# Allegro board LED5.brd
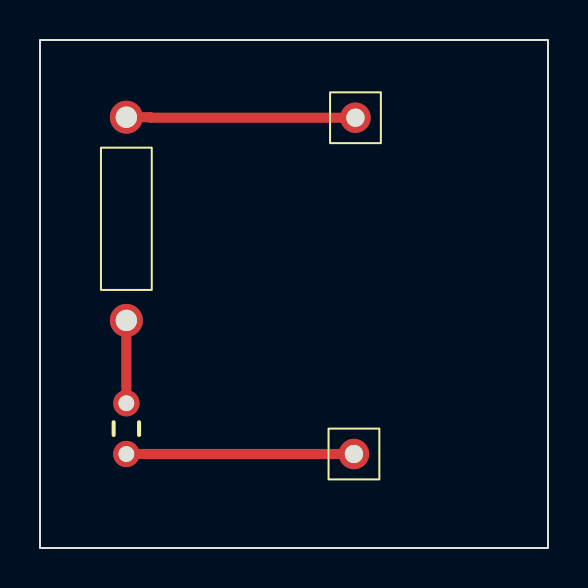
[diagram p0: board, top side]
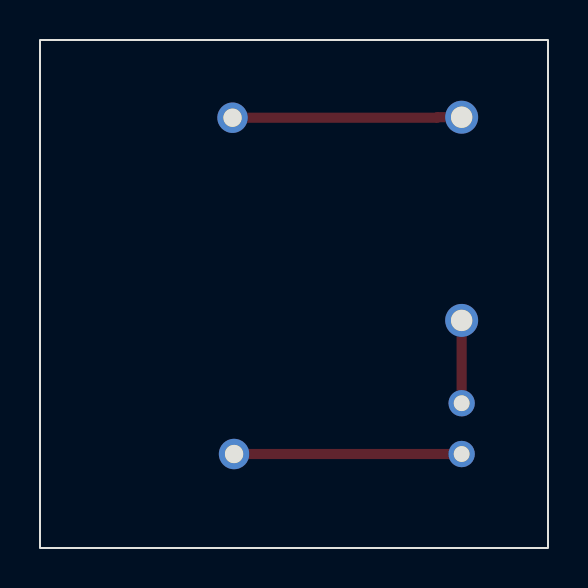
[diagram p1: board, bottom side, seen from below]

Outline 25.4 x 25.4 mm; copper layers: TOP, BOTTOM. Coordinates in mm from the lower left corner of the outline.
Outline path: rectangle 0,0 25.4,25.4

## Design rules (mm)
constraint set DEFAULT: min track width 0.508

## Placement (name value [footprint] x y rotation side)
D1  LA_541B-TYP  [RAD100X050LS100031]  4.32 7.24 270 top
J1  CON1  [JUMPER1]  15.77 21.51 0 top
J2  CON1  [JUMPER1]  15.7 4.7 0 top
R1  500  [RES400]  4.32 11.38 0 top

## Library data of the parts
D1 = LA_541B-TYP
J1 J2 = CON1: User Part Number: ***
R1 = R: Tolerance: ***; User Part Number: ***

## Footprints (pads in the part's own frame, mm; a bottom-side part is the same pattern mirrored in y, then rotated)
JUMPER1
  round 1.524 hole 0.914: 1(0,0)
RAD100X050LS100031
  round 1.321 hole 0.787: 1(0,0) 2(2.54,0)
RES400
  round 1.651 hole 1.067: 1(0,0) 2(0,10.16)

## Nets
0: D1.2 J2.1
N00083: J1.1 R1.2
N00236: D1.1 R1.1

## Routing (per net, layer and track width the routed paths; a pad name or vN(x,y) marks a point on that pad's centre or on a via; arc(x,y) is an arc through that point)
0: length 11.4
  TOP w0.508: 4.32,4.7 J2.1
N00083: length 11.5
  TOP w0.508: R1.2 5.52,21.54 5.55,21.51 J1.1
N00236: length 4.1
  TOP w0.508: R1.1 D1.1
